# EAGLE board Tardis Light (EAGLE 6.1)
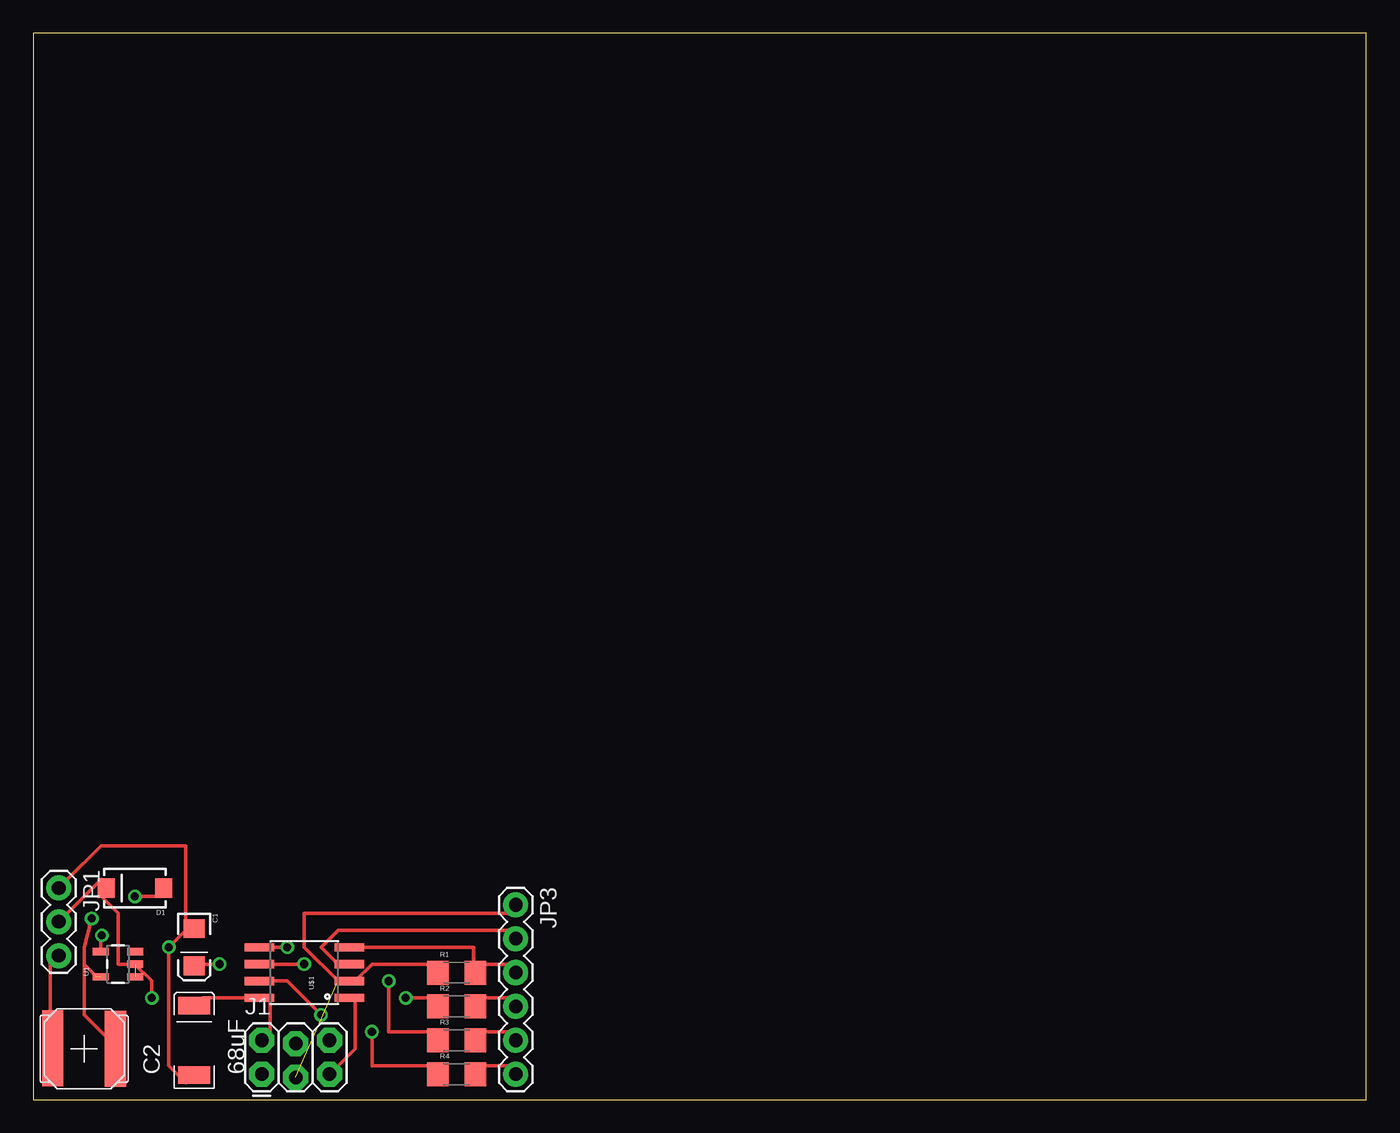
[diagram p0: board, top side]
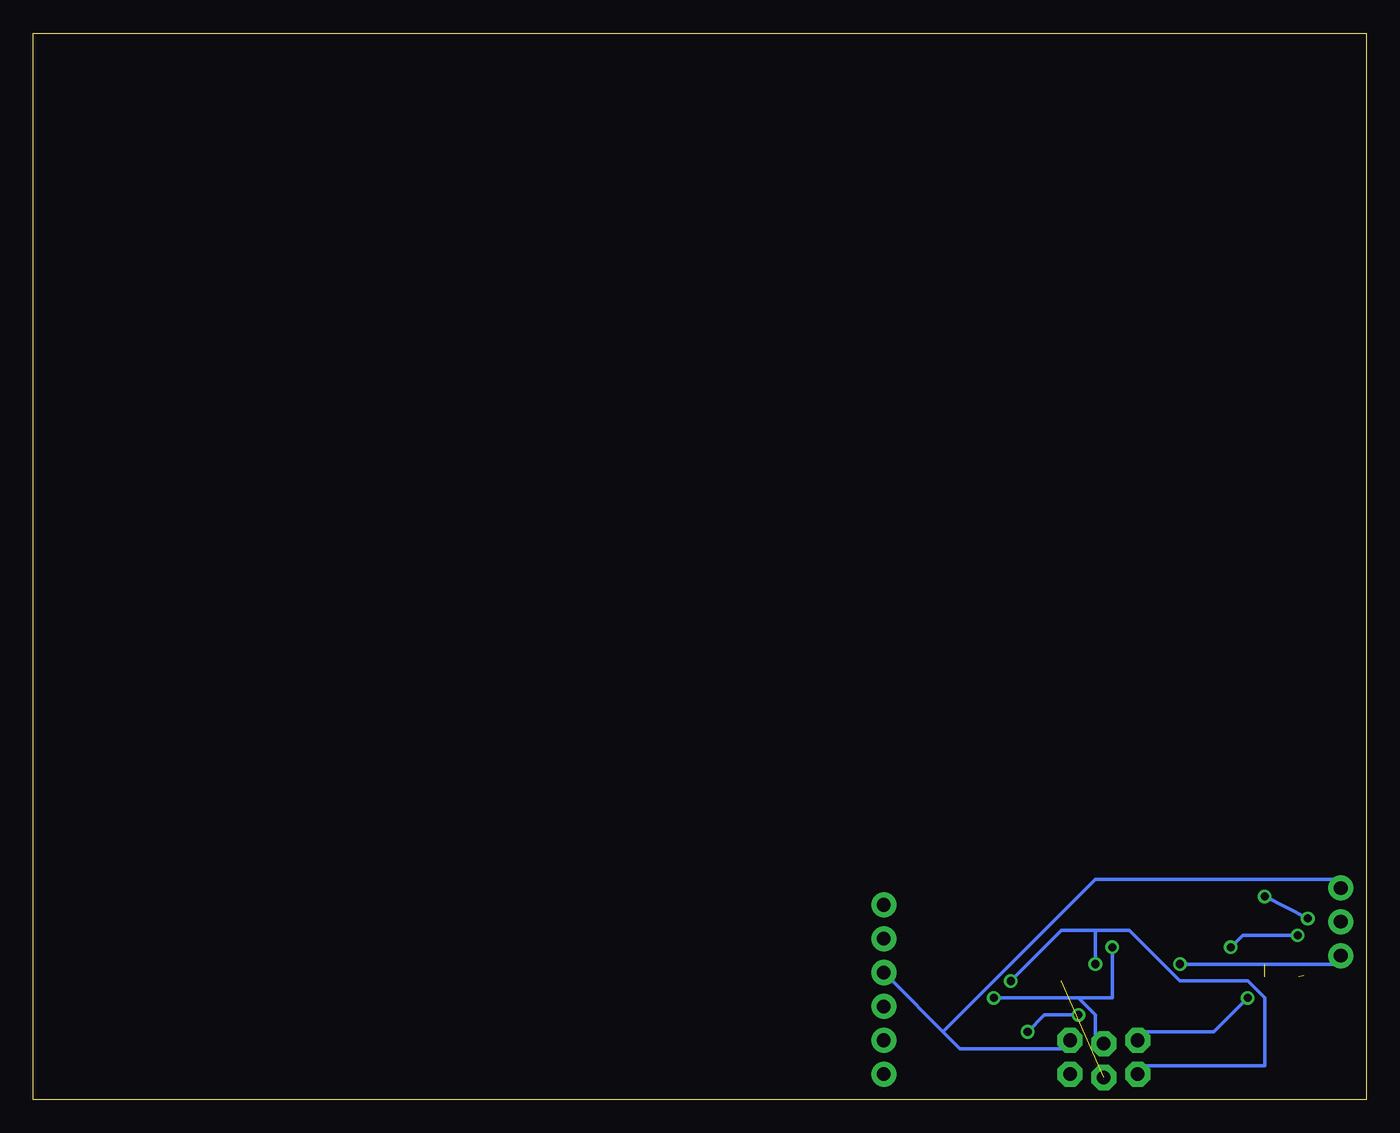
[diagram p1: board, bottom side, seen from below]

Size 100 x 80 mm. Coordinates in mm from the lower left corner, seen from the top.
Outline: 0,0 100,0 100,80 0,80 0,0
Copper layers (1*16): Top 0.035mm / dielectric 1.5mm / Bottom 0.035mm
Design rules: minimum track width 10mil, minimum drill 24mil, track to track 8mil, track to pad 8mil, pad to pad 8mil, via to via 8mil, smd to smd 8mil, copper to edge 40mil, drill to drill 8mil, minimum pad ring 10mil, minimum via ring 8mil, stop-mask expansion 4mil, vias tented up to drill 0mil, thermal gap 10mil

## Footprints (pad centres in the part's own frame; a part is rotated, then mirrored left to right if it is on the bottom)
EIA3216 = smd 1.4 x 1.6: A 1.4,0; C -1.4,0
EIA2917 = smd 1.3 x 2.4: A 2.6,0; C -2.6,0
SMA-DIODE = smd 1.27 x 1.47: A -2.15,0; C 2.15,0
2X3_LOCK = drill 1.016 pad 1.88 octagon: 1 0,0; 2 0,2.54; 3 2.54,-0.254; 4 2.54,2.286; 5 5.08,0; 6 5.08,2.54
1X03 = drill 1.016 pad 1.88: 1 0,0; 2 2.54,0; 3 5.08,0
1X06 = drill 1.016 pad 1.88: 1 0,0; 2 2.54,0; 3 5.08,0; 4 7.62,0; 5 10.16,0; 6 12.7,0
NR6028 = smd 5.7 x 1.6: P$1 -0.05,-2.35; P$2 0,2.35
1206 = smd 1.6 x 1.8: 1 -1.4,0; 2 1.4,0
SOT23-5 = smd 0.55 x 1.2: 1 -0.95,-1.3; 2 0,-1.3; 3 0.95,-1.3; 4 0.95,1.3; 5 -0.95,1.3
SO08-EIAJ = smd 0.61 x 2.21: 1 -1.905,-3.378; 2 -0.635,-3.378; 3 0.635,-3.378; 4 1.905,-3.378; 5 1.905,3.353; 6 0.635,3.353; 7 -0.635,3.353; 8 -1.905,3.353

## Placement (x,y rotation side)
C1  10uF  [EIA3216]  12.06,11.43 270 top
C2  68uF  [EIA2917]  12.06,4.45 90 top
D1  MBRA140  [SMA-DIODE]  7.62,15.88 180 top
J1  AVR_SPI_PRG_62X3_LOCK  [2X3_LOCK]  17.14,1.91 0 top
JP1  [1X03]  1.91,15.88 270 top
JP3  [1X06]  36.2,14.61 270 top
L1  47 uH  [NR6028]  3.81,3.81 270 top
R1  10k  [1206]  31.75,9.53 0 top
R2  0 ohm  [1206]  31.75,6.99 0 top
R3  0 ohm  [1206]  31.75,4.45 0 top
R4  0 ohm  [1206]  31.75,1.91 0 top
U1  NCP1402  [SOT23-5]  6.35,10.16 90 top
U$1  ATTINY45  [SO08-EIAJ]  20.32,9.53 90 top

## Library data of the parts
C1 C2 D1 J1 JP1 JP3 R1-R4 U1 U$1 = SparkFun
L1 = ieee-ucsd-lbr_inductor-bourns Roy Edit

## Nets
A_PIN3: J1.3 JP3.1 R1.1 U$1.2
A_PIN4: JP3.2 U$1.3
GND: C1.C C2.C J1.6 JP1.1 JP3.3 R1.2 U1.4 U$1.4
N$1: JP3.4 R2.2
N$3: D1.A L1.P$2 U1.5
N$6: JP3.5 R3.2
N$7: JP3.6 R4.2
PIN0: J1.4 R2.1 U$1.5
PIN1: J1.1 R3.1 U$1.6
PIN2: R4.1 U$1.7
RST: J1.5 U$1.1
VIN: C1.A JP1.3 L1.P$1
VOUT: C2.A D1.C J1.2 JP1.2 U1.1 U1.2 U$1.8

## Tracks (layer width: path | path; a pad name or v marks a point on that pad's centre or on a via)
A_PIN3  (1 unrouted)
  Top 0.254: R1.1 30.48,10.16 25.4,10.16 24.13,8.89 U$1.2 22.86,8.89 20.32,11.43 20.32,13.97 35.56,13.97 JP3.1
A_PIN4
  Top 0.254: U$1.3 22.86,10.16 21.59,11.43 22.86,12.7 35.56,12.7 JP3.2
GND  (via drill 0.6 pad 0.25)
  Top 0.254: 33.02,10.16 35.56,10.16 JP3.3 | 33.02,10.16 R1.2 33.02,10.16 | 33.02,10.16 33.02,11.43 24.13,11.43 U$1.4 | 11.43,12.7 v10.16,11.43 10.16,2.54 11.43,1.27 C2.C | 11.43,12.7 C1.C 11.43,12.7 | 11.43,12.7 11.43,19.05 5.08,19.05 2.54,16.51 JP1.1 | U1.4 5.05,12.22 v5.14,12.32
  Bottom 0.254: 31.75,5.08 35.56,8.89 JP3.3 | 31.75,5.08 30.48,3.81 22.86,3.81 J1.6 | 31.75,5.08 20.32,16.51 2.54,16.51 JP1.1 | v5.14,12.32 9.27,12.32 v10.16,11.43
N$1
  Top 0.254: R2.2 33.02,7.62 35.56,7.62 JP3.4
N$3  (via drill 0.61)  (1 unrouted)
  Top 0.254: v7.62,15.24 10.16,15.24 D1.A | 3.81,11.43 v4.38,13.59 | 3.81,10.16 3.81,6.35 6.35,3.81 L1.P$2 | 3.81,10.16 3.81,11.43 | 3.81,11.43 3.81,10.16 | 3.81,10.16 4.45,9.53 | 3.81,11.43 3.81,10.16 | 3.81,10.16 4.7,9.27
  Bottom 0.254: v4.38,13.59 v7.62,15.24
N$6
  Top 0.254: R3.2 33.02,5.08 35.56,5.08 JP3.5
N$7
  Top 0.254: R4.2 33.02,2.54 35.56,2.54 JP3.6
PIN0  (via drill 0.61)
  Top 0.254: v27.94,7.62 30.48,7.62 R2.1 | v19.05,11.43 17.78,11.43 U$1.5
  Bottom 0.254: 21.59,7.62 v27.94,7.62 | 21.59,7.62 20.32,6.35 20.32,3.81 J1.4 | v19.05,11.43 19.05,7.62 21.59,7.62
PIN1  (via drill 0.61)
  Top 0.254: v26.67,8.89 26.67,5.08 30.48,5.08 R3.1 | v20.32,10.16 17.78,10.16 U$1.6
  Bottom 0.254: v26.67,8.89 22.86,12.7 20.32,12.7 | 20.32,12.7 17.78,12.7 13.97,8.89 8.89,8.89 7.62,7.62 7.62,2.54 16.51,2.54 J1.1 | 20.32,12.7 v20.32,10.16
PIN2  (via drill 0.61)
  Top 0.254: v25.4,5.08 25.4,2.54 30.48,2.54 R4.1 | v21.59,6.35 19.05,8.89 17.78,8.89 U$1.7
  Bottom 0.254: v25.4,5.08 24.13,6.35 v21.59,6.35
RST
  Top 0.254: U$1.1 24.13,7.62 24.13,3.81 22.86,2.54 J1.5
VIN  (via drill 0.61)
  Top 0.254: v13.97,10.16 12.7,10.16 C1.A | L1.P$1 1.27,5.08 1.27,10.16 JP1.3
  Bottom 0.254: v13.97,10.16 2.54,10.16 JP1.3
VOUT  (via drill 0.61)  (1 unrouted)
  Top 0.254: 7.62,10.16 6.35,10.16 6.35,13.97 5.08,15.24 D1.C 5.08,16.51 2.54,13.97 JP1.2 | 7.62,10.16 U1.2 7.62,10.16 | J1.2 17.78,5.08 17.78,7.62 U$1.8 16.51,7.62 12.7,7.62 C2.A | 7.62,10.16 8.89,8.89 v8.89,7.62
  Bottom 0.254: v8.89,7.62 11.43,5.08 16.51,5.08 J1.2